# Altium PCB Project.PcbDoc (part 2 of 5)
Units mm, origin at the board's own origin, x right, y up, seen from the top; angles counter-clockwise.
Board outline 95 x 65 mm, 6 copper layers (Top Layer, L2 - GND, L3 - PWR, L4 - Sig, L5 - GND, Bottom Layer), stack 1.538 mm thick; 346 components, 317 nets, 1244 pads, 645 vias.
Unrouted connection lines stored in the file: 109.
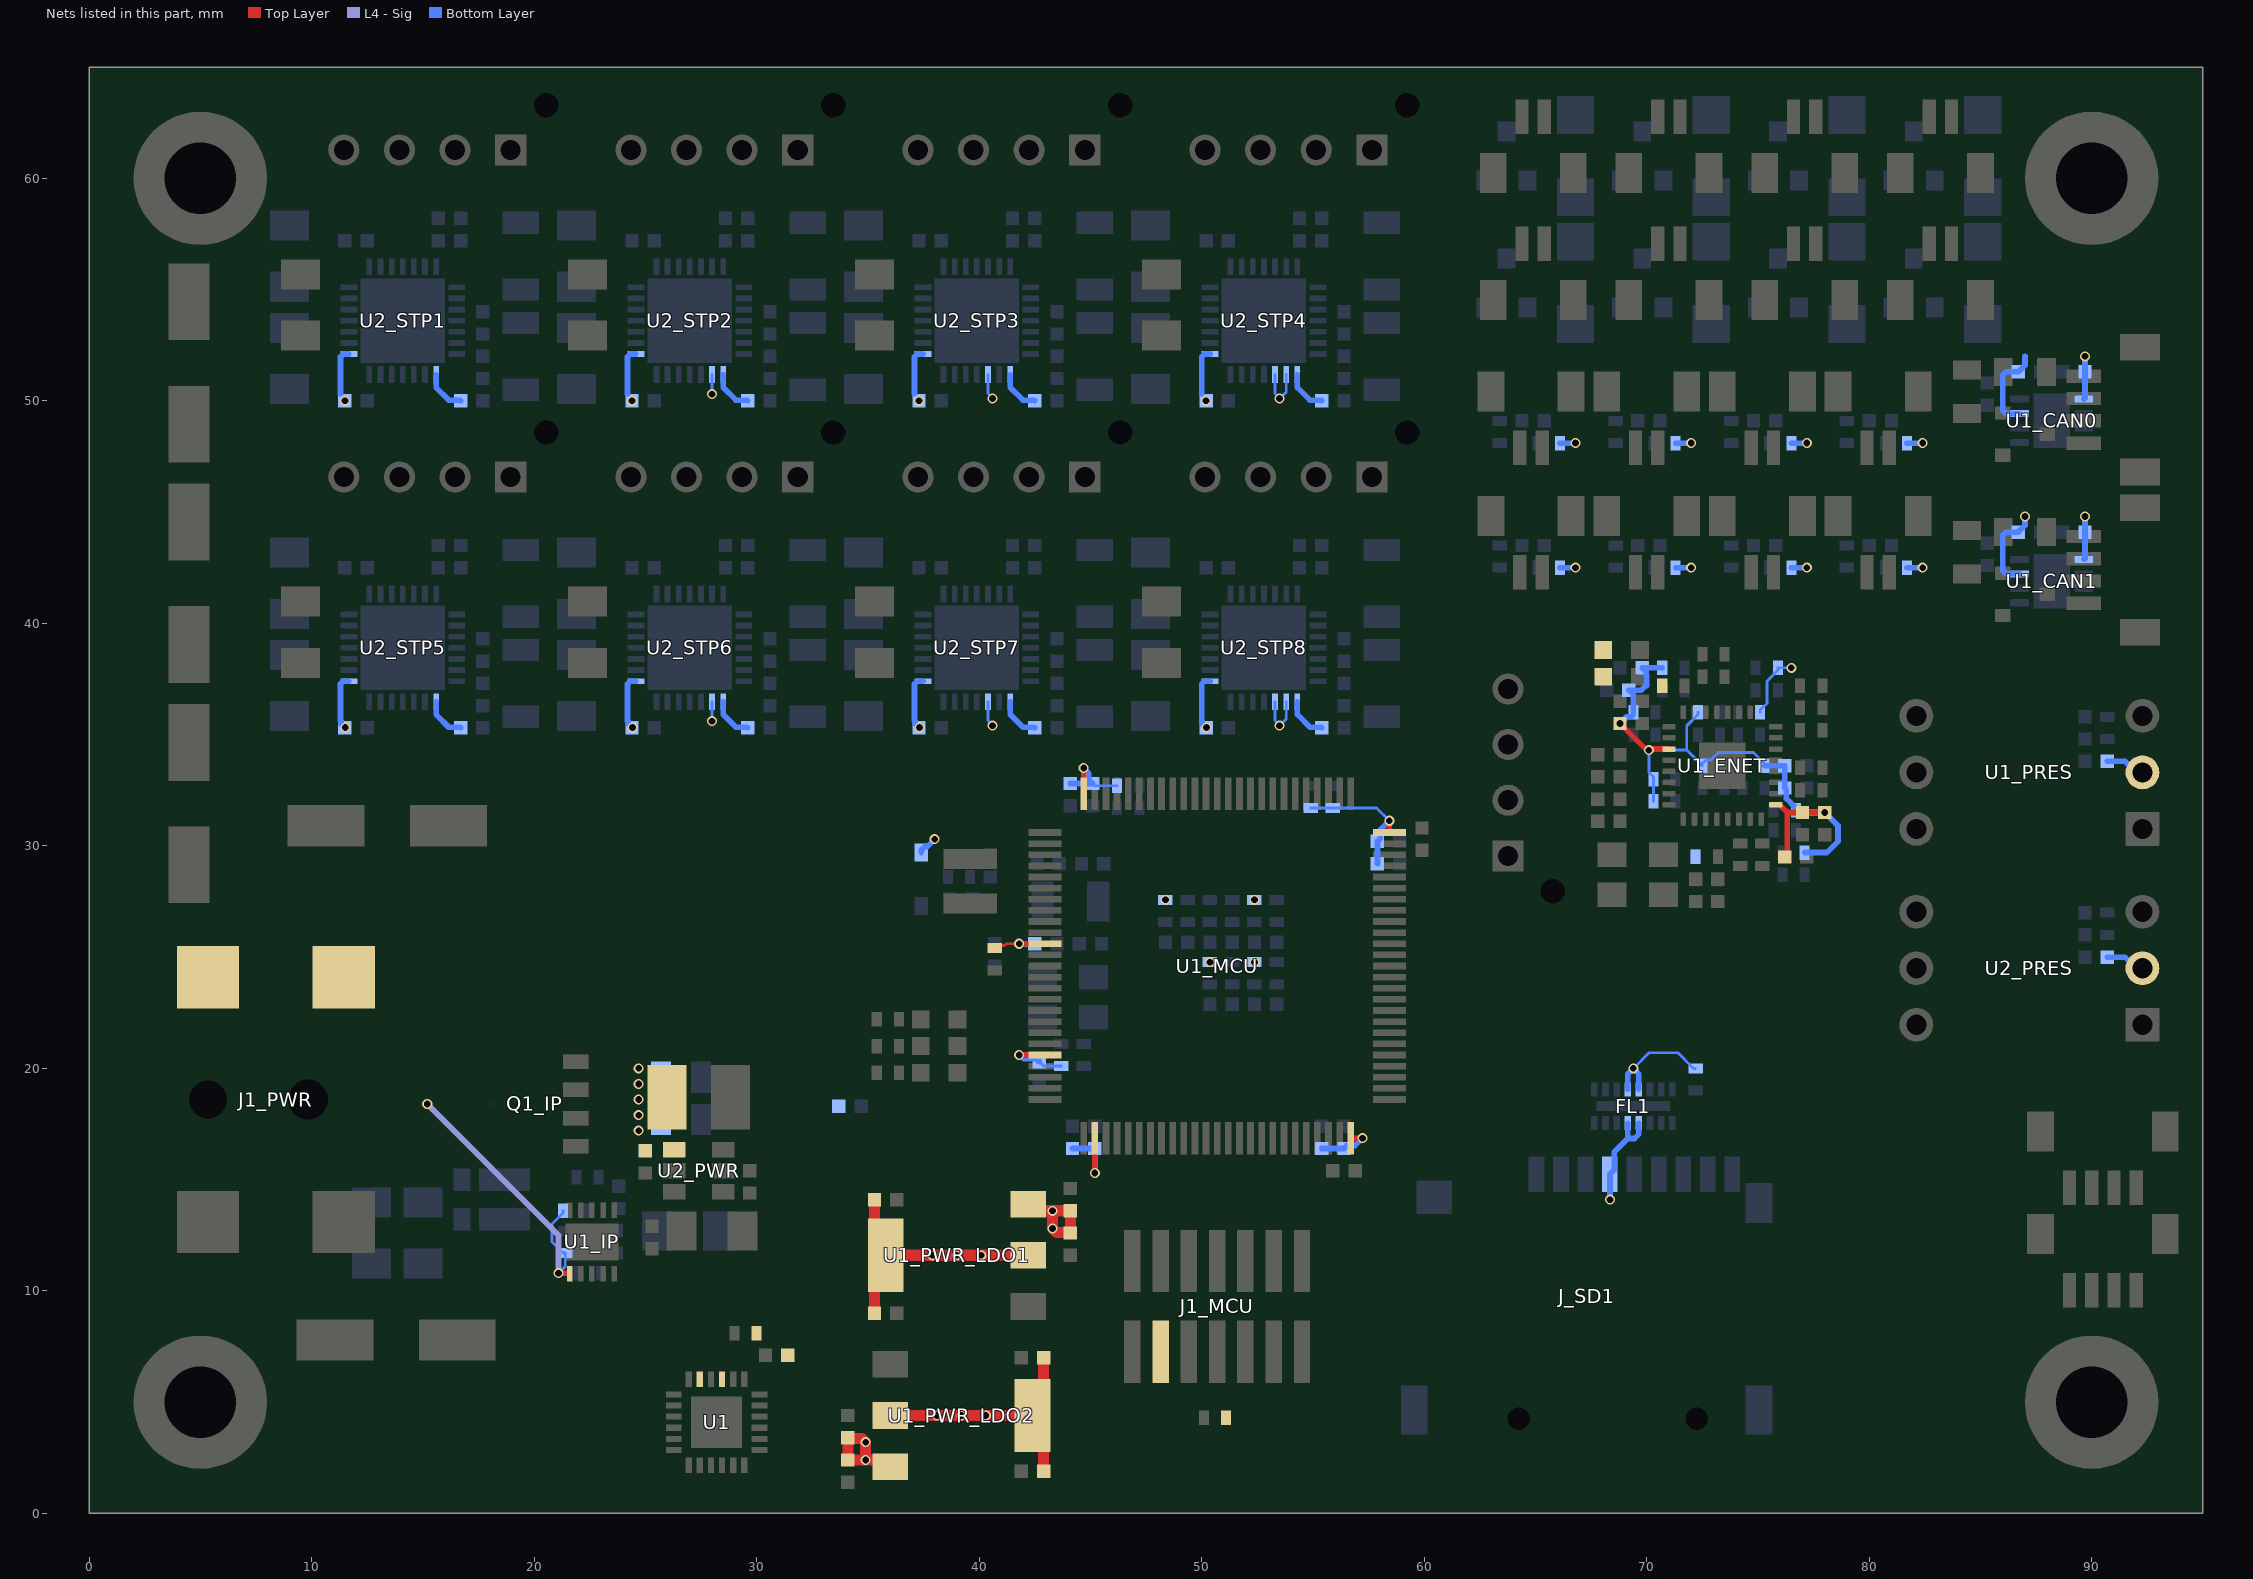
[diagram p5: the nets of this part, all layers, seen from the top]

## Components (designator, comment, footprint, x,y, rotation, side; value= is the part's Value field where it differs from the comment) (continued)
R26_ENET "CR0402-JW-222GLF" "Generic 0402 Resistor" 69.9,36 r180 bottom value=2.2k
R27_ENET "CR0402-JW-222GLF" "Generic 0402 Resistor" 73,32.6 r0 bottom value=2.2k
R28_ENET "CR0402-JW-222GLF" "Generic 0402 Resistor" 74.8,32.6 r180 bottom value=2.2k
R29_ENET "CR0402-JW-222GLF" "Generic 0402 Resistor" 72.7,28.5 r0 bottom value=2.2k
R30_ENET "CR0402-JW-222GLF" "Generic 0402 Resistor" 72.8,35 r0 bottom value=2.2k
R31_ENET "CR0402-JW-222GLF" "Generic 0402 Resistor" 76.2,30.7 r180 bottom value=2.2k
R32_ENET "CR0402-JW-222GLF" "Generic 0402 Resistor" 74.6,35 r180 bottom value=2.2k
R33_ENET "CR0402-JW-222GLF" "Generic 0402 Resistor" 75.4,37 r180 bottom value=2.2k
R34_ENET "CR0402-JW-222GLF" "Generic 0402 Resistor" 71.2,37 r0 bottom value=2.2k
R35_ENET "CR0402-JW-222GLF" "Generic 0402 Resistor" 76.6,28.7 r180 bottom value=2.2k
R36_ENET "CR0402-JW-222GLF" "Generic 0402 Resistor" 69.9,35 r0 bottom value=2.2k
R51 "ERJ-2GEJ103X" "Generic 0402 Resistor" 72.2,19.5 r90 bottom value=10k
TVS1_CAN0 "PESD2CANFD54VT-QR" PESD2CANFD54VT-QR 87,48.5 r270 top (schematic designator TVS1)
TVS1_CAN1 "PESD2CANFD54VT-QR" PESD2CANFD54VT-QR 87,41.3 r270 top (schematic designator TVS1)
U1 "PI4IOE5V6416ZDEX" PI4IOE5V6416ZDEX 28.2,4.1 r0 top
U1_CAN0 "TJA1051TK/3/1J" TJA1044xxK 88.2,49.1 r0 bottom (schematic designator U1)
U1_CAN1 "TJA1051TK/3/1J" TJA1044xxK 88.2,41.9 r0 bottom (schematic designator U1)
U1_ENET "DP83826ERHBR" DP83826ERHBR 73.4,33.6 r0 top
U1_IP "LTC4368CDD-2#PBF" DFN-10_3x3x0.8mm_P0.5mm 22.6,12.2 r90 top
U1_MCU "STM32H723VET6" STM32H723VxT 50.7,24.6 r0 top
U1_PRES "XGZP6857A100KPGPN33" 6-DIP_XGZP6857 87.2,33.3 r180 top
U1_PWR_LDO1 "AZ1117IH-3.3TRG1" ZLDO1117QG33TA 39,11.6 r90 top (schematic designator U1_PWR)
U1_PWR_LDO2 "AZ1117IH-3.3TRG1" ZLDO1117QG33TA 39.2,4.4 r270 top (schematic designator U1_PWR)
U2_PRES "XGZP6857A100KPGPN33" 6-DIP_XGZP6857 87.2,24.5 r180 top
U2_PWR "AP63205WU-7" "TSOT-26-6 - 3.2mm" 27.4,15.4 r90 top
U2_STP1 "TMC2209-LA" QFN-28_5x5x0.9mm_P0.5mm 14.1,53.6 r180 bottom (schematic designator U2)
U2_STP2 "TMC2209-LA" QFN-28_5x5x0.9mm_P0.5mm 27,53.6 r180 bottom (schematic designator U2)
U2_STP3 "TMC2209-LA" QFN-28_5x5x0.9mm_P0.5mm 39.9,53.6 r180 bottom (schematic designator U2)
U2_STP4 "TMC2209-LA" QFN-28_5x5x0.9mm_P0.5mm 52.8,53.6 r180 bottom (schematic designator U2)
U2_STP5 "TMC2209-LA" QFN-28_5x5x0.9mm_P0.5mm 14.1,38.9 r180 bottom (schematic designator U2)
U2_STP6 "TMC2209-LA" QFN-28_5x5x0.9mm_P0.5mm 27,38.9 r180 bottom (schematic designator U2)
U2_STP7 "TMC2209-LA" QFN-28_5x5x0.9mm_P0.5mm 39.9,38.9 r180 bottom (schematic designator U2)
U2_STP8 "TMC2209-LA" QFN-28_5x5x0.9mm_P0.5mm 52.8,38.9 r180 bottom (schematic designator U2)
Y1_ENET "ECS-250-12-33B2Q-JES-TR3" ECS-250-12-33B2Q-JES-TR3 69.6,28.7 r0 top
Y1_MCU "Q0.032768-JTX310-7-10-T3-HMR-LF" JTX310 44.1,27.5 r0 bottom
Y2_MCU "ECS-250-12-33B2Q-JES-TR3" ECS-250-12-33B2Q-JES-TR3 44,23.2 r180 bottom

## Footprints (in the part's own frame and the unit in brackets; to place one, negate y for a bottom-side part, rotate by r counter-clockwise, add the part's x,y. Pads: shape width x height; smd on the part's side, far side on the other; paste and mask are expansions set on the pad)
6-DIP_XGZP6857 [mm] "CF Sensor XGZP6857 6-DIP"
  rrect6% 1.52x1.52 hole 0.91: 1(-5.08,2.54)
  round 1.52 hole 0.91: 2(-5.08,0) 3(-5.08,-2.54) 4(5.08,-2.54) 5(5.08,0) 6(5.08,2.54)
  silkscreen extent -5.27,-4.3 4.3,4.3, body extent -5.21,-4.25 5.21,4.25, height 9.6
"0805 Resistor" [mm] "Chip Resistor, 2-Leads, Body 2.00x1.20mm, IPC Medium Density"
  rect 0.85x1.25 smd: 1(-0.975,0) 2(0.975,0)
  silkscreen extent -0.15,-0.53 0.15,0.53, body extent -1,-0.63 1,0.63, height 0.5
"CUI PJ-002AH-SMT-TR" [mm]
  rect 2.8x2.8 smd: 1(-2.25,5.5) 1(3.85,5.5) 2(-2.25,-5.5) 3(3.85,-5.5)
  round 0 hole 1.7 unplated: M(-2.25,0)
  round 0 hole 1.8 unplated: M(2.25,0)
  silkscreen extent -7.25,-4.5 7.55,4.5, body extent -7.25,-6.3 7.55,6.3, height 11.4
DFN-10_3x3x0.8mm_P0.5mm [mm] "LTC4368CDD-2#PBF"
  rect 0.7x0.25 smd: 1(-1.425,1) 2(-1.425,0.5) 3(-1.425,0) 4(-1.425,-0.5) 5(-1.425,-1) 6(1.425,-1) 7(1.425,-0.5) 8(1.425,0) 9(1.425,0.5) 10(1.425,1)
  rect 1.65x2.38 smd: 11(0,0)
  silkscreen extent -2.06,-1.55 1.55,1.56, body extent -1.88,-1.65 1.88,1.65, height 0.25
DP83826ERHBR [mm] "32-VQFN (5x5)"
  rrect40% 0.6x0.25 smd: 1(-2.4,1.75) 2(-2.4,1.25) 3(-2.4,0.75) 4(-2.4,0.25) 5(-2.4,-0.25) 6(-2.4,-0.75) 7(-2.4,-1.25) 8(-2.4,-1.75) 17(2.4,-1.75) 18(2.4,-1.25) 19(2.4,-0.75) 20(2.4,-0.25) 21(2.4,0.25) 22(2.4,0.75) 23(2.4,1.25) 24(2.4,1.75)
  rrect40% 0.25x0.6 smd: 9(-1.75,-2.4) 10(-1.25,-2.4) 11(-0.75,-2.4) 12(-0.25,-2.4) 13(0.25,-2.4) 14(0.75,-2.4) 15(1.25,-2.4) 16(1.75,-2.4) 25(1.75,2.4) 26(1.25,2.4) 27(0.75,2.4) 28(0.25,2.4) 29(-0.25,2.4) 30(-0.75,2.4) 31(-1.25,2.4) 32(-1.75,2.4)
  rrect4% 2.1x2.1 smd: 33(0,0)
  silkscreen extent -2.95,-2.5 2.5,2.5, body extent -2.5,-2.5 2.5,2.5, height 1
ECLAMP2410PQTCT [mm]
  rect 0.63x0.3 smd: 1(-0.76,1.75) 2(-0.76,1.25) 3(-0.76,0.75) 4(-0.76,0.25) 5(-0.76,-0.25) 6(-0.76,-0.75) 7(-0.76,-1.25) 8(-0.76,-1.75) 9(0.76,-1.75) 10(0.76,-1.25) 11(0.76,-0.75) 12(0.76,-0.25) 13(0.76,0.25) 14(0.76,0.75) 15(0.76,1.25) 16(0.76,1.75)
  rect 0.45x3.3 smd paste-3: 17(0,0)
  silkscreen extent -1.55,-2.22 0.8,2.22, body extent -0.85,-2.05 0.85,2.05, height 0.7
ECS-250-12-33B2Q-JES-TR3 [mm] "3.2x2.5"
  rect 1.3x1.1 smd: 1(-1.15,-0.9) 2(1.15,-0.9) 3(1.15,0.9) 4(-1.15,0.9)
  silkscreen extent -2.37,-1.25 0.27,1.25, body extent -1.6,-1.25 1.6,1.25, height 0.8
FP-95400-MFG [mm]
  rect 1.7x1.68 smd paste+0 mask+0: 1(-1.85,0) 2(1.85,0)
  silkscreen extent -2.25,-1.4 2.25,1.4, body extent -2.55,-1.34 2.55,1.33, height 2.29
FP-B4B-XH-AM_LF_SN-MFG [mm]
  rect 1.4x1.4 hole 0.9: 1(3.75,-0.525)
  round 1.4 hole 0.9: 2(1.25,-0.525) 3(-1.25,-0.525) 4(-3.75,-0.525)
  rect 0x0 hole 1.1 unplated: H1(5.35,1.475)
  silkscreen extent -6.2,-2.88 6.77,2.88, body extent -6.3,-2.98 6.3,2.98, height 0.25
FP-DFE322520F_D-IPC_A [mm]
  rect 1.753x2.904 smd paste+0 mask+0: 1(-1.425,0) 2(1.425,0)
  silkscreen extent -0.25,-1.45 0.25,1.45, body extent -2.8,-1.95 2.8,1.95, height 0.25
FP-SML-D12-MFG [mm]
  rect 0.8x0.8 smd paste+0 mask+0: 1(-0.825,0) 2(0.825,0)
  silkscreen extent -0.2,-0.3 0.2,0.3, body extent -0.8,-0.4 0.8,0.4, height 0.56
FP-WSKW0612-MFG [mm]
  rect 1.01x2.287 smd: 1(-0.885,-0.571) 2(0.885,-0.572)
  rect 1.01x0.762 smd: S1(-0.885,1.334) S2(0.885,1.334)
  silkscreen extent -1.83,-1.65 0,1.65, body extent -0.75,-1.53 0.75,1.53, height 0.71
FTSH-107-01-L-DV-K-TR [mm]
  rect 0.74x2.79 smd: 1(-3.81,-2.035) 2(-3.81,2.035) 3(-2.54,-2.035) 4(-2.54,2.035) 5(-1.27,-2.035) 6(-1.27,2.035) 7(0,-2.035) 8(0,2.035) 9(1.27,-2.035) 10(1.27,2.035) 11(2.54,-2.035) 12(2.54,2.035) 13(3.81,-2.035) 14(3.81,2.035)
  silkscreen extent -4.51,-4.09 4.51,0.27, body extent -4.61,-3.53 4.61,3.53, height 0.25
"Generic 0402 capacitor" [mm] "Generic 0402 capacitor"
  rect 0.6x0.6 smd: 1(-0.5,0) 2(0.5,0)
  body extent -0.5,-0.25 0.5,0.25, height 0.5
"Generic 0402 Resistor" [mm]
  rect 0.45x0.65 smd: 1(-0.5,0) 2(0.5,0)
  silkscreen extent -0.1,-0.25 0.1,0.25, body extent -0.5,-0.25 0.5,0.25, height 0.35
"Generic 0805 Cap" [mm] "Chip Capacitor, 2-Leads, Body 2.00x1.25mm, IPC Medium Density"
  rect 0.9x1.4 smd: 1(-0.9,0) 2(0.9,0)
  silkscreen extent -0.05,-0.6 0.05,0.6, body extent -1,-0.63 1,0.63, height 0.9
"Generic 1206 Capacitor" [mm] "Chip Capacitor, 2-Leads, Body 3.20x1.60mm, IPC Medium Density"
  rect 1.35x1.75 smd: 1(-1.375,0) 2(1.375,0)
  silkscreen extent -0.3,-0.77 0.3,0.77, body extent -1.6,-0.8 1.6,0.8, height 1.6
"Generic 1206 resistor" [mm] "Chip Resistor, 2-Leads, Body 3.20x1.60mm, IPC Medium Density"
  rect 1x1.65 smd: 1(-1.5,0) 2(1.5,0)
  silkscreen extent -0.6,-0.72 0.6,0.72, body extent -1.6,-0.8 1.6,0.8, height 0.6
"JST BM02B-SRSS-TB" [mm] "1.0mm pitch/Disconnectable Crimp style connector"
  rect 0.6x1.55 smd: 1(-0.5,-1.262) 2(0.5,-1.262)
  rect 1.2x1.8 smd: M(-1.8,1.262) M(1.8,1.262)
  silkscreen extent -2.03,-1.68 2.03,1.91, body extent -2,-1.69 2,1.91, height 4.32
"JST BM04B-SRSS-TB" [mm] "1.0mm pitch/Disconnectable Crimp style connector"
  rect 0.6x1.55 smd: 1(-1.5,-1.262) 2(-0.5,-1.262) 3(0.5,-1.262) 4(1.5,-1.262)
  rect 1.2x1.8 smd: M(-2.8,1.262) M(2.8,1.262)
  silkscreen extent -3.03,-1.68 3.03,1.91, body extent -3,-1.69 3,1.91, height 4.32
JTX310 [mm]
  rect 1x1.8 smd: 1(-1.25,0) 2(1.25,0)
  silkscreen extent -0.5,-0.85 0.5,0.85, body extent -1.6,-0.75 1.6,0.75, height 0.9
MS920SE-FL27E [mm]
  rect 0.9x2.4 smd: 1(-1,6.85) 2(1,6.85)
  silkscreen extent -4.75,-4.75 4.75,9.1, body extent -4.75,-4.75 4.75,8.05, height 2.85
MSD-4-A [mm] "micro sd"
  rect 0.7x1.6 smd: 1(2.25,7.75) 2(1.15,7.75) 3(0.05,7.75) 4(-1.05,7.75) 5(-2.15,7.75) 6(-3.25,7.75) 7(-4.35,7.75) 8(-5.45,7.75) 9(-6.55,7.75)
  round 0 hole 1 unplated: M1(-4.95,-3.25) M2(3.05,-3.25)
  rect 1.2x1.8 smd: S1(-7.75,6.45)
  rect 1.6x1.5 smd: S2(6.85,6.7)
  rect 1.2x2.2 smd: S3(-7.75,-2.85) S4(7.75,-2.85)
  silkscreen extent -7.37,-7.25 7.37,9.2, body extent -8.08,-7.25 8.07,7.8, height 1.8
PESD2CANFD54VT-QR [mm] "TO-236AB"
  rect 0.6x0.7 smd paste-0.05: 1(-0.95,-1) 2(0.95,-1) 3(0,1)
  silkscreen extent -1.88,-1.08 1.45,0.65, body extent -1.45,-1.15 1.45,1.15, height 1.1
PI4IOE5V6416ZDEX [mm]
  rect 0.7x0.28 smd: 1(-1.93,1.25) 2(-1.93,0.75) 3(-1.93,0.25) 4(-1.93,-0.25) 5(-1.93,-0.75) 6(-1.93,-1.25) 13(1.93,-1.25) 14(1.93,-0.75) 15(1.93,-0.25) 16(1.93,0.25) 17(1.93,0.75) 18(1.93,1.25)
  rect 0.28x0.7 smd: 7(-1.25,-1.93) 8(-0.75,-1.93) 9(-0.25,-1.93) 10(0.25,-1.93) 11(0.75,-1.93) 12(1.25,-1.93) 19(1.25,1.93) 20(0.75,1.93) 21(0.25,1.93) 22(-0.25,1.93) 23(-0.75,1.93) 24(-1.25,1.93)
  rect 2.3x2.3 smd: 25(0,0)
  silkscreen extent -2.35,-2 2,2, body extent -2,-2 2,2, height 0.9
QFN-28_5x5x0.9mm_P0.5mm [mm] "ADI TQFN-28"
  rect 0.757x0.255 smd: 1(-2.423,1.5) 2(-2.423,1) 3(-2.423,0.5) 4(-2.423,0) 5(-2.423,-0.5) 6(-2.423,-1) 7(-2.423,-1.5) 15(2.423,-1.5) 16(2.423,-1) 17(2.423,-0.5) 18(2.423,0) 19(2.423,0.5) 20(2.423,1) 21(2.423,1.5)
  rect 0.255x0.757 smd: 8(-1.5,-2.423) 9(-1,-2.423) 10(-0.5,-2.423) 11(0,-2.423) 12(0.5,-2.423) 13(1,-2.423) 14(1.5,-2.423) 22(1.5,2.423) 23(1,2.423) 24(0.5,2.423) 25(0,2.423) 26(-0.5,2.423) 27(-1,2.423) 28(-1.5,2.423)
  rect 3.8x3.8 smd: 29(0,0)
  silkscreen extent -3.07,-2.63 2.63,2.63, body extent -2.5,-2.5 2.5,2.5, height 0.89
SML-D12P8WT86C [mm]
  rect 0.8x0.8 smd paste+0 mask+0: 1(-0.825,0) 2(0.825,0)
  silkscreen extent -0.2,-0.3 0.2,0.3, body extent -0.8,-0.4 0.8,0.4, height 0.56
SOD-323 [mm]
  rect 0.8x0.6 smd paste+0 mask+0: 1(-1.2,0) 2(1.2,0)
  silkscreen extent -1.45,-0.7 1,0.7, body extent -1.34,-0.65 1.34,0.65, height 1.15
SSM3K376R,LF [mm] "SOT23F"
  rect 0.9x0.8 smd: 1(-1.1,0.95) 2(-1.1,-0.95) 3(1.1,0)
  silkscreen extent -1.98,-1.4 0.9,1.4, body extent -1.2,-1.45 1.2,1.45, height 0.88
STL220N6F7 [mm] "8-PowerVDFN"
  rect 0.65x1.15 smd: 1(-1.905,-3.48) 2(-0.635,-3.48) 3(0.635,-3.48) 4(1.905,-3.48)
  round 0.025 smd: 5(0,0.232)
  silkscreen extent -2.8,-2.87 2.72,1.97, body extent -2.6,-3.78 2.6,2.37, height 1
STM32H723VxT [mm]
  rect 1.475x0.3 smd: 1(-7.738,6) 2(-7.738,5.5) 3(-7.738,5) 4(-7.738,4.5) 5(-7.738,4) 6(-7.738,3.5) 7(-7.738,3) 8(-7.738,2.5) 9(-7.738,2) 10(-7.738,1.5) 11(-7.738,1) 12(-7.738,0.5) 13(-7.738,0) 14(-7.738,-0.5) 15(-7.738,-1) 16(-7.738,-1.5) 17(-7.738,-2) 18(-7.738,-2.5) 19(-7.738,-3) 20(-7.738,-3.5) 21(-7.738,-4) 22(-7.738,-4.5) 23(-7.738,-5) 24(-7.738,-5.5) 25(-7.738,-6) 51(7.738,-6) 52(7.738,-5.5) 53(7.738,-5) 54(7.738,-4.5) 55(7.738,-4) 56(7.738,-3.5) 57(7.738,-3) 58(7.738,-2.5) 59(7.738,-2) 60(7.738,-1.5) 61(7.738,-1) 62(7.738,-0.5) 63(7.738,0) 64(7.738,0.5) 65(7.738,1) 66(7.738,1.5) 67(7.738,2) 68(7.738,2.5) 69(7.738,3) 70(7.738,3.5) 71(7.738,4) 72(7.738,4.5) 73(7.738,5) 74(7.738,5.5) 75(7.738,6)
  rect 0.3x1.475 smd: 26(-6,-7.738) 27(-5.5,-7.738) 28(-5,-7.738) 29(-4.5,-7.738) 30(-4,-7.738) 31(-3.5,-7.738) 32(-3,-7.738) 33(-2.5,-7.738) 34(-2,-7.738) 35(-1.5,-7.738) 36(-1,-7.738) 37(-0.5,-7.738) 38(0,-7.738) 39(0.5,-7.738) 40(1,-7.738) 41(1.5,-7.738) 42(2,-7.738) 43(2.5,-7.738) 44(3,-7.738) 45(3.5,-7.738) 46(4,-7.738) 47(4.5,-7.738) 48(5,-7.738) 49(5.5,-7.738) 50(6,-7.738) 76(6,7.738) 77(5.5,7.738) 78(5,7.738) 79(4.5,7.738) 80(4,7.738) 81(3.5,7.738) 82(3,7.738) 83(2.5,7.738) 84(2,7.738) 85(1.5,7.738) 86(1,7.738) 87(0.5,7.738) 88(0,7.738) 89(-0.5,7.738) 90(-1,7.738) 91(-1.5,7.738) 92(-2,7.738) 93(-2.5,7.738) 94(-3,7.738) 95(-3.5,7.738) 96(-4,7.738) 97(-4.5,7.738) 98(-5,7.738) 99(-5.5,7.738) 100(-6,7.738)
  silkscreen extent -7.97,-6.65 6.65,6.83, body extent -8,-8 8,8, height 1.6
TJA1044xxK [mm] "8-HVSON (3x3)"
  rrect25% 0.84x0.32 smd: 1(-1.445,0.975) 2(-1.445,0.325) 3(-1.445,-0.325) 4(-1.445,-0.975) 5(1.445,-0.975) 6(1.445,-0.325) 7(1.445,0.325) 8(1.445,0.975)
  rect 1.65x2.45 smd paste-2: 9(0,0)
  silkscreen extent -2.25,-1.5 1.5,1.5, body extent -1.5,-1.5 1.52,1.5, height 1
"TSOT-26-6 - 3.2mm" [mm]
  rect 0.7x1 smd: 1(0.95,1.1) 2(0,1.1) 3(-0.95,1.1) 4(-0.95,-1.1) 5(0,-1.1) 6(0.95,-1.1)
  silkscreen extent 1.55,1.24 1.65,1.35, body extent -1.45,-1.2 1.45,1.2, height 1
UWZ1V101MCL1GS [mm]
  rect 3.45x1.85 smd: 1(-2.75,0) 2(2.75,0)
  silkscreen extent -3.4,-3.5 3.55,3.5, body extent -3.75,-3.4 3.75,3.4, height 8
ZLDO1117QG33TA [mm] "SOT-223-3"
  rect 1.2x1.6 smd: 1(-2.3,-3.2) 2(0,-3.2) 3(2.3,-3.2)
  rect 3.3x1.6 smd: 4(0,3.2)
  silkscreen extent -3.4,-4.68 3.4,1.9, body extent -3.25,-3.5 3.25,3.5, height 1.65

## Part data
B1_MCU: library part CMP-00029-00001-1, "Secondary Battery, Manganese Silicon Lithium, 3V, 0.011Ah", Voltage Rating=3V, Pins=2, RoHS Compliant=Yes
C1 C1_BTN1 C1_BTN2 C1_BTN3 C1_BTN4 C1_BTN5 C1_BTN6 C1_BTN7 C1_BTN8 C1_CAN0 C1_CAN1 C1_ENET C1_MCU C1_PRES C1_STP1 C1_STP2 C1_STP3 C1_STP4 C1_STP5 C1_STP6 C1_STP7 C1_STP8 C2_CAN0 C2_CAN1 C2_ENET C2_PRES C2_STP1 C2_STP2 C2_STP3 C2_STP4 C2_STP5 C2_STP6 C2_STP7 C2_STP8 C3_PRES C3_STP1 C3_STP2 C3_STP3 C3_STP4 C3_STP5 C3_STP6 C3_STP7 C3_STP8 C4_PRES C4_STP1 C4_STP2 C4_STP3 C4_STP4 C4_STP5 C4_STP6 C4_STP7 C4_STP8 C5_ENET C5_STP1 C5_STP2 C5_STP3 C5_STP4 C5_STP5 C5_STP6 C5_STP7 C5_STP8 C7_ENET C8_ENET C9_PWR C11_ENET C12_PWR C13_MCU C13_PWR C14_MCU C14_PWR C15_MCU C15_PWR C16_MCU C16_PWR C17_MCU C18_MCU C19_MCU C32: library part CMP-001-00084-12, "Ceramic Capacitor, Multilayer, Ceramic, 50V, 10% +Tol, 10% -Tol, X7R, 15% TC, 0.1uF, Surface Mount, 0402", Capacitor Type=Ceramic, Case/Package=0402, Max Operating Temperature=125°C, Min Operating Temperature=-55°C, Package Shape=Rectangular, Temperature Coefficient=X7R, Tolerance=10%, Voltage Rating=50V, AECQ=Yes, Dielectric Material=Ceramic, Mounting Technology="Surface Mount", Multilayer=Yes, Packaging="Tape and Reel", Pins=2, Reach SVHC Compliant=Yes, RoHS Compliant=Yes, Terminal Finish=Nickel, Termination=Wraparound
  C13_MCU: PlaceNear=C13_MCU.2:U1_MCU.100:5mm
  C14_MCU: PlaceNear=C14_MCU.2:U1_MCU.11:5mm
  C15_MCU: PlaceNear=C15_MCU.2:U1_MCU.27:5mm
  C16_MCU: PlaceNear=C16_MCU.2:U1_MCU.50:5mm
  C17_MCU: PlaceNear=C17_MCU.2:U1_MCU.75:5mm
  C18_MCU: PlaceNear=C18_MCU.2:U1_MCU.21:5mm
C1_IP C17_PWR C18_PWR C19_PWR C20_PWR: library part CMP-001-00099-2, "Aluminum Electrolytic Capacitor, Polarized, Aluminum (wet), 35V, 20% +Tol, 20% -Tol, 100uF, Surface Mount, 2626", Capacitor Type=Aluminium, Case/Package="6.60mm x 6.60mm", Max Operating Temperature=105°C, Min Operating Temperature=-55°C, Ripple Current=84mA, Voltage Rating=35V, AECQ=Yes, Mounting Technology="Surface Mount", Pins=2, RoHS Compliant=Yes
C1_PWR_LDO1 C1_PWR_LDO2 C4_PWR_LDO1 C4_PWR_LDO2 C6_STP1 C6_STP2 C6_STP3 C6_STP4 C6_STP5 C6_STP6 C6_STP7 C6_STP8: library part CMP-001-00085-5, "Ceramic Capacitor, Multilayer, Ceramic, 10V, 20% +Tol, 20% -Tol, X5R, 15% TC, 4.7uF, Surface Mount, 0402", Capacitor Type=Ceramic, Case/Package=0402, Max Operating Temperature=85°C, Min Operating Temperature=-55°C, Package Shape=Rectangular, Rated DC Voltage (URdc)=10V, Temperature Coefficient=X5R, Tolerance=0%, Tolerance  (fill in as +-)=20%, AECQ=Yes, Dielectric Material=Ceramic, Mounting Technology="Surface Mount", Multilayer=Yes, Packaging="Tape and Reel", Pins=2, Reach SVHC Compliant=Yes, RoHS Compliant=Yes, Termination=Wraparound, Tolerance (fill in as +-)=20%, Voltage Rating=10V
C2_IP C3_IP C10_PWR C11_PWR: library part CMP-001-00086-3, "Ceramic Capacitor, Multilayer, Ceramic, 100V, 10% +Tol, 10% -Tol, X7R, 15% TC, 2.2uF, Surface Mount, 1206", Capacitor Type=Ceramic, Case/Package=1206, Max Operating Temperature=-55°C, Min Operating Temperature=125°C, Temperature Coefficient=X7R, Tolerance=10%, Voltage Rating=100V, AECQ=Yes, Mounting Technology=SMD, Pins=2, RoHS Compliant=Yes
C2_MCU C3_MCU: library part CMP-001-00111-2, "Ceramic Capacitor, Multilayer, Ceramic, 50V, 3.57% +Tol, 3.57% -Tol, C0G, 30ppm/Cel TC, 0.000007uF, Surface Mount, 0402", Capacitor Type=Ceramic, Case/Package=0402, Max Operating Temperature=125°C, Min Operating Temperature=-55°C, Temperature Coefficient=C0G, Tolerance=3.5%, Voltage Rating=50V, AECQ=Yes, Mounting Technology="Surface Mount", Pins=2, RoHS Compliant=Yes
C2_PWR_LDO1 C2_PWR_LDO2 C3_PWR_LDO1 C3_PWR_LDO2 C4_IP: library part CMP-001-00103-2, "Ceramic Capacitor, Multilayer, Ceramic, 16V, 20% +Tol, 20% -Tol, X7R, 15% TC, 0.22uF, Surface Mount, 0402", Capacitor Type=Ceramic, Case/Package=0402, Max Operating Temperature=125°C, Min Operating Temperature=-55°C, Temperature Coefficient=X7R, Tolerance=20%, Voltage Rating=16V, AECQ=Yes, Mounting Technology=SMD, Pins=2
C3_CAN0 C3_CAN1: library part CMP-001-00110-2, "Ceramic Capacitor, Multilayer, Ceramic, 100V, 10% +Tol, 10% -Tol, X7R, 15% TC, 0.0047uF, Surface Mount, 0402", Capacitor Type=Ceramic, Case/Package=0402, Max Operating Temperature=125°C, Min Operating Temperature=-55°C, Temperature Coefficient=X7R, Tolerance=10%, Voltage Rating=100V, AECQ=Yes, Mounting Technology=SMD, Pins=2, RoHS Compliant=Yes
C3_ENET C9_ENET C9_MCU: library part CMP-001-00108-2, "Multilayer Ceramic Capacitors MLCC - SMD/SMT 0402 10uF 6.3VDC 20% X6S AEC-Q200", Capacitor Type=Ceramic, Case/Package=0402, Max Operating Temperature=105°C, Min Operating Temperature=-55°C, Temperature Coefficient=X6S, Tolerance=20%, Voltage Rating=6.3V, AECQ=Yes, Mounting Technology="Surface Mount", Pins=2, RoHS Compliant=Yes
C4_ENET C5_PWR C6_PWR C10_ENET: library part CMP-001-00104-2, "Cap Cer 1UF 20V X7T 0402", Capacitor Type=Ceramic, Case/Package=0402, Max Operating Temperature=125°C, Min Operating Temperature=-55°C, Temperature Coefficient=X7R, Tolerance=20%, Voltage Rating=10V, AECQ=Yes, Mounting Technology="Surface Mount", Pins=2, RoHS Compliant=Yes
C4_MCU C5_MCU C13_ENET C14_ENET: library part CMP-001-00109-2, "Ceramic Capacitor, Multilayer, Ceramic, 25V, 5% +Tol, 5% -Tol, C0G, 30ppm/Cel TC, 0.000012uF, Surface Mount, 0402", Capacitor Type=Ceramic, Case/Package=0402, Max Operating Temperature=125°C, Min Operating Temperature=-55°C, Temperature Coefficient=C0G, Tolerance=5%, Voltage Rating=25V, AECQ=Yes, Mounting Technology="Surface Mount", Pins=2, RoHS Compliant=Yes
C5_IP: library part CMP-001-00102-3, "Ceramic Capacitor, Multilayer, Ceramic, 100V, 10% +Tol, 10% -Tol, X7R, 15% TC, 0.0015uF, Surface Mount, 0402", Capacitor Type=Ceramic, Case/Package=0402, Max Operating Temperature=125°C, Min Operating Temperature=-55°C, Temperature Coefficient=X7R, Tolerance=10%, Voltage Rating=100V, AECQ=Yes, Mounting Technology=SMD, Pins=2
C6_ENET C12_ENET: library part CMP-001-00101-2, "Ceramic Capacitor, Multilayer, Ceramic, 100V, 10% +Tol, 10% -Tol, X7R, 15% TC, 0.001uF, Surface Mount, 0402", Capacitor Type=Ceramic, Case/Package=0402, Max Operating Temperature=125°C, Min Operating Temperature=-55°C, Temperature Coefficient=X7R, Tolerance=10%, Voltage Rating=100V, AECQ=Yes, Mounting Technology=SMD, Pins=2
C7_MCU C8_MCU C10_MCU C11_MCU C12_MCU: library part CMP-001-00096-4, "Mlcc, 2.2 Uf, # 20 %, 0402, 6.3V, X7T, T&r Q200", Capacitor Type=Ceramic, Case/Package=0402, Max Operating Temperature=125°C, Min Operating Temperature=-55°C, Temperature Coefficient=X7T, Tolerance=20%, Voltage Rating=6.3V, AECQ=Yes, Mounting Technology=SMD, Pins=2
  C7_MCU: PlaceNear=C7_MCU.2:U1_MCU.73:5mm
  C8_MCU: PlaceNear=C8_MCU.2:U1_MCU.48:5mm
C7_PWR C8_PWR: library part CMP-001-00095-2, "22 µF ±20% 10V Ceramic Capacitor X7T 0805 (2012 Metric)", Capacitor Type=Ceramic, Case/Package=0805, Max Operating Temperature=125°C, Min Operating Temperature=-55°C, Temperature Coefficient=X7T, Tolerance=20%, Voltage Rating=10V, AECQ=Yes, Mounting Technology=SMD, Pins=2
C7_STP1 C7_STP2 C7_STP3 C7_STP4 C7_STP5 C7_STP6 C7_STP7 C7_STP8: library part CMP-001-00113-1, "50V 47nF X7R ±10% 0402 Multilayer Ceramic Capacitors MLCC - SMD/SMT ROHS", Capacitor Type=Ceramic, Case/Package=0402, Max Operating Temperature=125°C, Min Operating Temperature=-55°C, Tolerance=10%, Voltage Rating=50V, AECQ=No, Mounting Technology=SMD, Pins=2
C8_STP1 C8_STP2 C8_STP3 C8_STP4 C8_STP5 C8_STP6 C8_STP7 C8_STP8 C9_STP1 C9_STP2 C9_STP3 C9_STP4 C9_STP5 C9_STP6 C9_STP7 C9_STP8 C10_STP1 C10_STP2 C10_STP3 C10_STP4 C10_STP5 C10_STP6 C10_STP7 C10_STP8: library part CMP-001-00092-6, "Ceramic Capacitor, Multilayer, Ceramic, 50V, 20% +Tol, 20% -Tol, X5R, 15% TC, 10uF, Surface Mount, 1206", Capacitor Type=Ceramic, Case/Package=1206, Max Operating Temperature=85°C, Min Operating Temperature=-55°C, Package Shape=Rectangular, Temperature Characteristics Code=X5R, Tolerance=20%, Voltage Rating=50V, AECQ=No, Dielectric Material=Ceramic, JESD-609 Code=e3, Mounting Technology="Surface Mount", Multilayer=Yes, Packaging="Tape and Reel", Pins=2, Reach SVHC Compliant=Yes, RoHS Compliant=Yes, Temperature Coefficient=X5R, Terminal Finish=Nickel, Termination=Wraparound
C15_ENET: library part CMP-001-00093-4, "50V 2.2nF X7R 卤10% 0402 Multilayer Ceramic Capacitors MLCC - SMD/SMT ROHS", Capacitor Type=Ceramic, Case/Package=0402, Max Operating Temperature=150°C, Min Operating Temperature=-55°C, Package Shape=Rectangular, Temperature Coefficient=X7R, Tolerance=10%, Voltage Rating=50V, AECQ=Yes, Dielectric Material=Ceramic, Mounting Technology="Surface Mount", Multilayer=Yes, Packaging="Tape and Reel", Pins=2, Reach SVHC Compliant=Yes, RoHS Compliant=Yes
D1_ENET: library part CMP-007-00039-1, "Green 560nm LED Indication - Discrete 2.2V 0603 (1608 Metric)", Case/Package=0603, Colour=Green, Forward Voltage=2.2V, Pins=2
D1_MCU: library part CMP-004-00038-1, "Rectifier Diode, Schottky, 1 Phase, 1 Element, 0.35A, 30V V(RRM), Silicon", Case/Package=SOD-323, Forward Current=350mA, Forward Voltage=370mV, Max Operating Temperature=125°C, Min Breakdown Voltage=30V, Min Operating Temperature=-55°C, Max Output current=350mA, Pins=2, Reverse Recovery Time=10ns, RoHS Compliant=Yes
D2_ENET: library part CMP-007-00038-1, "Orange 605nm LED Indication - Discrete 2.2V 0603 (1608 Metric)", Case/Package=0603, Colour=Orange, Forward Voltage=2.2V, Pins=2
D2_MCU D3_MCU D4_MCU: library part CMP-007-00036-1, "Red 630nm LED Indication - Discrete 2.2V 0603 (1608 Metric)", Case/Package=0603, Colour=Red, Forward Voltage=2.2V, Pins=2
D_COIL1 D_COIL2 D_COIL3 D_COIL4 D_COIL5 D_COIL6 D_COIL7 D_COIL8: library part CMP-00005-4, "Rectifier Diode, Schottky, 1 Phase, 1 Element, 1.5A, 100V V(RRM), Silicon, DO-214AC", Case/Package=DO-214AC, Forward Current=1A, Forward Voltage=780mV, Max Operating Temperature=150°C, Min Operating Temperature=-55°C, Package Body Material=Plastic, Package Shape=Rectangular, Package Style="SMALL OUTLINEMeter", Peak Reflow Temperature (Cel)=260°C, Rep Pk Reverse Voltage-Max=100V, Time @ Peak Reflow Temperature-Max (s)=10s, AECQ=Yes, Diode Element Material=SILICON, Diode Type=RECTIFIER, JEDEC-95 Code=DO-214AC, JESD-30 Code=R-PDSO-C2, JESD-609 Code=e3, Moisture Sensitivity Level=1, Number of Elements=1, Pins=2, Reach SVHC Compliant=No, Reference Standard=AEC-Q101, RoHS Compliant=Yes, Surface Mount=Yes, Technology=SCHOTTKY, Terminal Finish=Tin
FL1: library part CMP-004-00034-1, "EMI Filter with Integrated ESD Protection 12pF 40dB 5V Flat Style SMD 16-Pin SLP4016P16 T/R", Max Breakdown Voltage=10V, Max Operating Temperature=125°C, Min Breakdown Voltage=6V, Min Operating Temperature=-40°C, Reverse Standoff Voltage=5V, China RoHS=Compliant, ESD Protection=Yes, Height=660.4µm, Length=3.9878mm, Lifecycle Status=Production, Packaging="Tape & Reel (TR)", Polarity=Bidirectional, REACH SVHC=Yes, RoHS=Compliant, Schedule B=8542390000, Width=1.6002mm
J1_ENET J_STP1 J_STP2 J_STP3 J_STP4 J_STP5 J_STP6 J_STP7 J_STP8: library part CMP-002-00133-1, "Header, Xh, Top, 4Way, 2.5Mm, Boss;", Case/Package=THT, Manufacturer=JST, Manufacturer Series=XH, Max Current Rating=3A, Max Operating Temperature=85°C, Min Operating Temperature=-25°C, Voltage Rating=250V, Connector Type=Header, Gender=Male, Height=7mm, Length=12.4mm, Pins=4, Pitch=2.4892mm
J1_I2C J2_I2C J_CAN0 J_CAN1: "CONN HEADER SMD 4POS 1MM", Current Rating (Amps)=0.7A, Insulation Color=Natural, Manufacturer="JST Sales America Inc.", Material Flammability Rating="UL94 V-0", Operating Temperature="-25°C ~ 85°C", Supplier Part Number 1=455-1790-1-ND, Voltage Rating=50V, ComponentLink1Description=Datasheet, ComponentLink1URL=http://www.jst-mfg.com/product/pdf/eng/eSH.pdf, ComponentLink2Description="DigiKey Link", ComponentLink2URL=http://digikey.com/product-detail/en/jst-sales-america-inc/BM04B-SRSS-TB-LF-SN/455-1790-1-ND/926861, Connector Type=Header, Contact Finish - Mating=Tin, Contact Finish - Post=Tin, Contact Material="Copper Alloy", Contact Shape=Square, Contact Type="Male Pin", Fastening Type=Push-Pull, Features="Solder Retention", Insulation Height="0.167\" (4.25mm)", Insulation Material="Polyamide (PA), Nylon", LastUpdated="8/24/2020 1:45:53 PM", Lifecycle Status=Active, Minimum Order=1, Mounting Type="Surface Mount", Number of Positions=4, Number of Positions Loaded=All, Number of Rows=1, Packaging=TapeAndReel, Part Number=BM04B-SRSS-TB(LF)(SN), Part Status=Active, PartId=16, Pitch - Mating="0.039\" (1.00mm)", Price=0.29, Row Spacing - Mating="-25°C ~ 85°C", Series=SR, Shrouding="Shrouded - 4 Wall", Style="Board to Cable/Wire", Supplier 1=DigiKey, Termination=Solder
J1_MCU: library part CMP-002-00103-1, "Board Connector, 14 Contact(s), 2 Row(s), Male, Straight, 0.05 inch Pitch, Surface Mount Terminal, Locking, Receptacle", Flammability Rating="UL94 V-0", Manufacturer=Samtec, Manufacturer Series=FTSH, Max Current Rating=3.4A, Body Breadth=0.135inch, Body Length=0.35inch, Body/Shell Style=RECEPTACLE, Connector Type="BOARD CONNECTOR", Contact Finish - Mating="GOLD (10) OVER NICKEL (50)", Contact Finish - Termination="Tin (Sn) - with Nickel (Ni) barrier", Contact Gender=Male, Contact Material=Bronze, Contact Pattern=RECTANGULAR, Contact Style="SQ PIN-SKT", DIN Conformance=No, Filter Feature=No, Gender=Male, IEC Conformance=No, Insulation Material=Polymer, JESD-609 Code=e3, Mating Contact Pitch=0.05inch, Mating Contact Row Spacing=0.05inch, Mating Information="MULTIPLE MATING PARTS AVAILABLE", MIL Conformance=No, Mixed Contacts=No, Mounting Option 1=LOCKING, Mounting Style=STRAIGHT, Mounting Technology=Board, Number Of Connectors=1, Number of Contacts=14, Number Of PCB Rows=2, Number of Rows Loaded=2, Option="General Purpose", PCB Contact Pattern=RECTANGULAR, PCB Contact Row Spacing=4.064mm, Pins=14, Plating Thickness=10uin, Reach SVHC Compliant=Yes, Reference Standard=UL, Reliability=COMMERCIAL, RoHS Compliant=Yes, Terminal Pitch=1.27mm, Termination=SMD/SMT
J1_PWR: "CONN PWR JACK 2X5.5MM SOLDER", Current Rating (Amps)=5A, Manufacturer="CUI Devices", Material Flammability Rating="UL94 V-0", Supplier Part Number 1=CP-002AHPJCT-ND, Voltage - Rated=24VDC, Actual Diameter="0.079\" (2.00mm ID), 0.256\" (6.50mm OD)", ComponentLink1Description=Datasheet, ComponentLink1URL=https://www.cuidevices.com/product/resource/digikeypdf/pj-002ah-smt-tr.pdf, ComponentLink2Description="DigiKey Link", ComponentLink2URL=http://digikey.com/product-detail/en/cui-devices/PJ-002AH-SMT-TR/CP-002AHPJCT-ND/669692, Connector Type=Jack, Features="Board Guide", Gender=Male, Industry Recognized Mating Diameter="2.00mm ID (0.079\"), 5.50mm OD (0.217\")", Internal Switch(s)="Single Switch, Normally Closed", LastUpdated="5/26/2020 1:33:39 PM", Lifecycle Status=Active, Mating Length/Depth="0.350\" (8.90mm)", Minimum Order=1, Mounting Type="Surface Mount", Number of Positions/Contacts="2 Conductors, 3 Contacts", Packaging=TapeAndReel, Part Number=PJ-002AH-SMT-TR, Part Status=Active, Price=0.90, Series=-, Shielding=Unshielded, Supplier 1=DigiKey, Termination=Solder
J_BTN1 J_BTN2 J_BTN3 J_BTN4 J_BTN5 J_BTN6 J_BTN7 J_BTN8 J_COIL1 J_COIL2 J_COIL3 J_COIL4 J_COIL5 J_COIL6 J_COIL7 J_COIL8: "CONN HEADER SMD 2POS 1MM", Current Rating (Amps)=0.7A, Insulation Color=Natural, Manufacturer="JST Sales America Inc.", Material Flammability Rating="UL94 V-0", Operating Temperature="-25°C ~ 85°C", Supplier Part Number 1=455-1788-1-ND, Voltage Rating=50V, ComponentLink1Description=Datasheet, ComponentLink1URL=http://www.jst-mfg.com/product/pdf/eng/eSR.pdf, ComponentLink2Description="DigiKey Link", ComponentLink2URL=http://digikey.com/product-detail/en/jst-sales-america-inc/BM02B-SRSS-TB-LF-SN/455-1788-1-ND/926859, Connector Type=Header, Contact Finish - Mating=Tin, Contact Finish - Post=Tin, Contact Material="Copper Alloy", Contact Shape=Square, Contact Type="Male Pin", Fastening Type=Push-Pull, Features="Solder Retention", Insulation Height="0.167\" (4.25mm)", Insulation Material="Polyamide (PA), Nylon", LastUpdated="1/12/2020 10:11:04 PM", Lifecycle Status=Active, Minimum Order=1, Mounting Type="Surface Mount", Number of Positions=2, Number of Positions Loaded=All, Number of Rows=1, Packaging=TapeAndReel, Part Number=BM02B-SRSS-TB(LF)(SN), Part Status=Active, PartId=12, Pitch - Mating="0.039\" (1.00mm)", Price=0.22, Series=SR, Shrouding="Shrouded - 4 Wall", Style="Board to Cable/Wire", Supplier 1=DigiKey, Termination=Solder
J_SD1: library part CMP-002-00094-1, "Micro SD Card Connector, 9 Positions, Connector and Ejector, Push In, Auto Eject Out, Surface Mount, 1.8 mm Height...", Case/Package="SD (Micro)", Manufacturer="Same Sky", Manufacturer Series=SD, Max Current Rating=500mA, Connector Type="SD Card", Gender=Female, Pins=9
L1_PWR: library part CMP-006-00022-5, "General Purpose Inductor, 4.7uH, 20%, 1 Element, Metal Alloy-Core, SMD, 1210", Case/Package=1210, Current Rating=2A, Max Operating Temperature=125°C, Min Operating Temperature=-40°C, Tolerance=20%, AECQ=Yes, ComponentLink2Description=https://www.bourns.com/docs/Product-Datasheets/SRP4021HMCT.pdf, DCR=98m, Pins=2
Q1_IP Q2_IP: library part CMP-013-00035-1, "Power Field-Effect Transistor, 120A I(D), 60V, 0.0014ohm, 1-Element, N-Channel, Silicon, Metal-oxide Semiconductor FET", Case/Package=8-PowerVDFN, Max Operating Temperature=175°C, Min Operating Temperature=-55°C, Power=4.8W, Pins=8, RoHS Compliant=Yes, Transistor Type=n-FET
Q_COIL1 Q_COIL2 Q_COIL3 Q_COIL4 Q_COIL5 Q_COIL6 Q_COIL7 Q_COIL8: library part CMP-013-00038-2, "Transistor MOSFET N-CH 30V 4A 3-Pin SOT-23F Emboss T/R", Case/Package=SOT-23F, Max Operating Temperature=150°C, Mounting Technology=SMD, Pins=3, RoHS Compliant=Yes, Transistor Type=n-FET, Vgs (Max)=12V, Vgs(th) (Max) @ Id=1V
R1 R1_BTN1 R1_BTN2 R1_BTN3 R1_BTN4 R1_BTN5 R1_BTN6 R1_BTN7 R1_BTN8 R1_PRES R2_PRES R51: library part CMP-009-00185-9, "Res Thick Film 0402 10K Ohm 5% 1/10W ±200ppm/°C Molded SMD Punched Carrier T/R", Case/Package=0402, Max Operating Temperature=155°C, Min Operating Temperature=-55°C, Power=100mW, Tolerance=5%, AECQ=No, Mounting Technology="Surface Mount", Pins=2, RoHS Compliant=Yes
R1_CAN0 R1_CAN1 R2_CAN0 R2_CAN1: library part CMP-009-00189-2, "Res 60.4 Ohm 1% 1/8W 0805", Case/Package=0805, Power=125mW, Tolerance=1%, AECQ=Yes, Manufacturer Part Number=TFA0805R60R4F-T5, Mounting Technology=SMD, Pins=2
R1_ENET R2_BTN1 R2_BTN2 R2_BTN3 R2_BTN4 R2_BTN5 R2_BTN6 R2_BTN7 R2_BTN8 R8_ENET R11_ENET R13_MCU: library part CMP-009-00182-8, "Fixed Resistor, Metal Glaze/thick Film, 0.0625W, 1000ohm, 50V, 1% +/-Tol, 100ppm/Cel, Surface Mount, 0402", Case/Package=0402, Manufacturer Part Number=Blank, Max Operating Temperature=155°C, Min Operating Temperature=-55°C, Package Height=0.35mm, Package Length=1mm, Package Shape=Rectangular, Package Width=0.5mm, Power=62.5mW, Rated Temperature=70°C, Resistor Type="FIXED RESISTOR", Temperature Coefficient (ppm/Cel)=100, Tolerance=1%, Working Voltage=50V, Additional Feature="LASER TRIMMABLE", AECQ=No, Construction=Chip, JESD-609 Code=e3, Mounting Technology="Surface Mount", Packaging="Tape and Reel", Pins=2, Reach SVHC Compliant=Yes, RoHS Compliant=Yes, Technology="METAL GLAZE/THICK FILM", Terminal Finish=Nickel, Termination=Wraparound
R1_IP: library part CMP-009-00192-1, "Fixed Resistor, Metal Strip, 1W, 0.002ohm, 0.045V, 1% +/-Tol, 150ppm/Cel, Surface Mount, 0612", Case/Package=0612, Manufacturer Part Number=TFA0805R60R4F-T5, Max Operating Temperature=170°C, Min Operating Temperature=-65°C, Power=1W, Tolerance=1%, AECQ=Yes, Mounting Technology="Surface Mount", Pins=4, RoHS Compliant=Yes
R1_MCU: library part CMP-009-00209-4, "Fixed Resistor, Metal Glaze/thick Film, 0.0625W, 620ohm, 50V, 5% +/-Tol, 100ppm/Cel, Surface Mount, 0402", Case/Package=0402, Max Operating Temperature=155°C, Min Operating Temperature=-55°C, Power=62.5mW, Tolerance=5%, AECQ=No, Mounting Technology="Surface Mount", Pins=2, RoHS Compliant=Yes
R1_PWR R2_PWR: library part CMP-009-00198-3, "Fixed Resistor, Metal Glaze/thick Film, 0.0625W, 36000ohm, 50V, 1% +/-Tol, 100ppm/Cel, Surface Mount, 0402", Case/Package=0402, Max Operating Temperature=155°C, Min Operating Temperature=-55°C, Power=62.5mW, Tolerance=1%, AECQ=Yes, Mounting Technology=SMD, Pins=2
R1_STP1 R1_STP2 R1_STP3 R1_STP4 R1_STP5 R1_STP6 R1_STP7 R1_STP8 R2_STP1 R2_STP2 R2_STP3 R2_STP4 R2_STP5 R2_STP6 R2_STP7 R2_STP8: library part CMP-009-00231-1, "Res 0.002 Ohm 1% 1.5W 1206", Case/Package=1206, Manufacturer Part Number=Blank, Max Operating Temperature=170°C, Min Operating Temperature=-55°C, Power=1.5W, Tolerance=1%, AECQ=Yes, Mounting Technology=SMD, Pins=2
R2_ENET R3_ENET R4_ENET R6_ENET R7_ENET R9_ENET R10_ENET: library part CMP-009-00205-4, "Fixed Resistor, Metal Glaze/thick Film, 0.1W, 33ohm, 50V, 1% +/-Tol, 100ppm/Cel, Surface Mount, 0402", Case/Package=0402, Max Operating Temperature=155°C, Min Operating Temperature=-55°C, Power=625mW, Tolerance=1%, Voltage Rating=50V, AECQ=Yes, Mounting Technology=SMD, Pins=2
R2_IP R3_IP: library part CMP-009-00199-3, "Fixed Resistor, Metal Glaze/thick Film, 0.0625W, 680000ohm, 50V, 5% +/-Tol, 100ppm/Cel, Surface Mount, 0402", Case/Package=0402, Max Operating Temperature=155°C, Min Operating Temperature=-55°C, Power=62.5mW, Tolerance=5%, AECQ=Yes, Mounting Technology=SMD, Pins=2
R2_MCU R3_MCU R3_PWR R4_MCU R4_PWR R5_MCU R5_PWR R6_MCU R6_PWR R7_MCU R7_PWR R8_MCU R8_PWR R9_PWR R10_PWR R14_ENET R16_ENET: library part CMP-009-00184-8, "Fixed Resistor, Metal Glaze/thick Film, 0.0625W, 4700ohm, 50V, 5% +/-Tol, 100ppm/Cel, Surface Mount, 0402", Case/Package=0402, Manufacturer Part Number=Blank, Max Operating Temperature=155°C, Min Operating Temperature=-55°C, Package Height=0.35mm, Package Length=1mm, Package Shape=Rectangular, Package Width=0.5mm, Power=62.5mW, Rated Temperature=70°C, Resistor Type="FIXED RESISTOR", Temperature Coefficient (ppm/Cel)=200, Tolerance=5%, Working Voltage=50V, Additional Feature="LASER TRIMMABLE", AECQ=No, Construction=Chip, JESD-609 Code=e3, Mounting Technology="Surface Mount", Packaging="Tape and Reel", Pins=2, Reach SVHC Compliant=Yes, RoHS Compliant=Yes, Technology="METAL GLAZE/THICK FILM", Terminal Finish=Nickel, Termination=Wraparound
R4_IP R6_IP: library part CMP-009-00221-1, "Res Thick Film 0402 11K Ohm 1% 0.063W(1/16W) ±100ppm/C Pad SMD Automotive T/R", Case/Package=0402, Max Operating Temperature=155°C, Min Operating Temperature=-55°C, Power=62.5mW, Tolerance=1%, AECQ=Yes, Mounting Technology="Surface Mount", Pins=2, RoHS Compliant=Yes
R5_IP: library part CMP-009-00193-3, "Fixed Resistor, Metal Glaze/thick Film, 0.125W, 22000ohm, 75V, 1% +/-Tol, 100ppm/Cel, Surface Mount, 0402", Case/Package=0402, Max Operating Temperature=155°C, Min Operating Temperature=-55°C, Power=125mW, Tolerance=1%, AECQ=Yes, Manufacturer Part Number=AC0402FR-7W22KL, Mounting Technology=SMD, Pins=2
R10_MCU R11_MCU R12_MCU: library part CMP-009-00225-1, "Res Thick Film 0402 330 Ohm 1% 0.063W ±100ppm/°C Molded SMD Paper T/R", Case/Package=0402, Max Operating Temperature=155°C, Min Operating Temperature=-55°C, Power=62.5mW, Tolerance=1%, AECQ=Yes, Mounting Technology="Surface Mount", Pins=2, RoHS Compliant=Yes
R12_ENET: library part CMP-009-00204-3, "Fixed Resistor, Metal Glaze/thick Film, 0.0625W, 6490ohm, 50V, 1% +/-Tol, 100ppm/Cel, Surface Mount, 0402", Case/Package=0402, Max Operating Temperature=155°C, Min Operating Temperature=-55°C, Power=625mW, Tolerance=1%, AECQ=Yes, Mounting Technology=SMD, Pins=2
R17_ENET R18_ENET R19_ENET R20_ENET R21_ENET R22_ENET R23_ENET R24_ENET R25_ENET R26_ENET R27_ENET R28_ENET R29_ENET R30_ENET R31_ENET R32_ENET R33_ENET R34_ENET R35_ENET R36_ENET: library part CMP-009-00183-8, "Fixed Resistor, Metal Glaze/thick Film, 0.0625W, 2200ohm, 50V, 5% +/-Tol, 200ppm/Cel, Surface Mount, 0402", Case/Package=0402, Manufacturer Part Number=Blank, Max Operating Temperature=125°C, Min Operating Temperature=-55°C, Package Height=0.35mm, Package Length=1mm, Package Shape=Rectangular, Package Width=0.5mm, Power=62.5mW, Rated Temperature=70°C, Resistor Type="FIXED RESISTOR", Temperature Coefficient (ppm/Cel)=200, Tolerance=5%, Working Voltage=50V, AECQ=No, Construction=Chip, JESD-609 Code=e3, Mounting Technology="Surface Mount", Packaging="Tape and Reel", Pins=2, Reach SVHC Compliant=No, RoHS Compliant=Yes, Technology="RUTHENIUM OXIDE", Terminal Finish=Nickel, Termination=Wraparound
TVS1_CAN0 TVS1_CAN1: library part CMP-004-00032-1, "ESD protection for in-vehicle networks", Case/Package=TO-236AB, AECQ=Yes, Pins=3
U1: library part CMP-031-00013-2, "16-bit I2C General Purpose IO Expander with Interrupt, Reset, -40 to 85 °C, RoHS", Case/Package=14-TSSOP, Max Operating Temperature=85°C, Max Supply Voltage=5.5V, Min Operating Temperature=-40°C, Min Supply Voltage=1.65V, AECQ=No, Height - Seated (Max)=900µm, Length=4mm, Lifecycle Status=Production, MPN=PI4IOE5V6416ZDEX, Number of Circuits=1, Number of Terminals=24, Pins=14, REACH SVHC=Yes, RoHS=Compliant, Schedule B="8542390000, 8542390000", Terminal Pitch=500µm, Width=4mm
U1_CAN0 U1_CAN1: library part CMP-031-00007-4, "Interface Circuit, PDSO8", Case/Package="8-HVSON (3x3)", Max Operating Temperature=150°C, Min Operating Temperature=-40°C, AECQ=Yes, MPN=TJA1051TK/3/1J, Pins=8
U1_ENET: library part CMP-031-00009-2, "Ethernet Transceiver, 1-Trnsvr, PQCC32", Case/Package="32-VQFN (5x5)", Max Operating Temperature=105°C, Min Operating Temperature=-40°C, AECQ=No, MPN=DP83826ERHBR, Pins=32
U1_IP: library part CMP-031-00016-1, "100V UV/OV and Reverse Protection Controller with Bidirectional Circuit Breaker", Case/Package="10-DFN (3x3)", Max Operating Temperature=70°C, Min Operating Temperature=0°C, MPN=LTC4368CMS-1#PBF, AECQ=Yes, Mounting Technology=SMD, Pins=10, RoHS Compliant=Yes
U1_MCU: library part CMP-020-00028-1, "MCU 32-bit ARM Cortex M7 RISC 512KB Flash 1.8V/2.5V/3.3V 100-Pin LQFP Tray", Case/Package="100-LQFP (14x14)", Frequency=550MHz, Max Operating Temperature=85°C, Min Operating Temperature=-40°C, PartId=1, RoHS Compliant=Yes
U1_PRES U2_PRES: library part CMP-010-00049-1, "Pressure Sensor 14.5PSI(-100 - 100)kPa", Case/Package=6-DIP, Max Operating Temperature=100°C, Min Operating Temperature=-20°C, Nominal Supply Voltage=3.3V, Mounting Technology=SMD, Pins=6, Sensor Type="Barometric Pressure"
U1_PWR_LDO1 U1_PWR_LDO2: library part CMP-019-00061-1, "LDO Voltage Regulator, 1 Output, Fixed, 0-15V in, 3.3V Out, 1.2V Drop, 1A out, SOT-223-3", Case/Package=SOT-223-3, Dropout Voltage=1.2V, Max Operating Temperature=125°C, Max Supply Voltage=15V, Min Input Voltage=4.8V, Min Operating Temperature=-40°C, Output Current=1A, Output Voltage=3.3V, AECQ=Yes, Mounting Technology=SMT, Pins=3
U2_PWR: "5V fixed step down Buck"
U2_STP1 U2_STP2 U2_STP3 U2_STP4 U2_STP5 U2_STP6 U2_STP7 U2_STP8: library part CMP-031-00019-2, "Step/Direction StealthChop Stepper Motor Driver Two-Phase 4.75V to 29V 28-Pin QFN Tray", Case/Package="32-TQFN (5x5)", Max Operating Temperature=125°C, Max Supply Voltage=29V, Min Operating Temperature=-40°C, Min Supply Voltage=1.5V, MPN=TMC5240ATJ+T, AECQ=No, Mounting Technology=SMD, Pins=32
Y1_ENET Y2_MCU: library part CMP-003-00030-1, "Crystal 25.000 Mhz 12PF SMD", Case/Package=3.2x2.5, Frequency=25MHz, Load Capacitance=12pF, Max Operating Temperature=125°C, Min Operating Temperature=-40°C, AECQ=Yes, ESR=50, Mounting Technology=SMD, Pins=4
Y1_MCU: library part CMP-003-00031-2, "Parallel - Fundamental Quartz Crystal, 0.032768MHz Nom", Case/Package=3.2.x1.5, Frequency=32.769kHz, Load Capacitance=7pF, Max Operating Temperature=125°C, Min Operating Temperature=-40°C, ESR=80k, Pins=2, RoHS Compliant=Yes

## Free pads (board coordinates)
  round 6 / inner round 0 / far side round 6 hole 3.2: MH1(5,5) MH2(5,60) MH3(90,60) MH4(90,5)

## Via types
v1: diameter 0.45, hole 0.3, Top Layer to Bottom Layer, tented both sides, 633 vias
v2: diameter 0.55, hole 0.4, Top Layer to Bottom Layer, tented both sides, 12 vias

## Nets (pads, with @x,y where several pads share a name; then routed paths per layer and width w, separated by ;. In a path a pad name is that pad's centre, name@x,y a point inside that pad or via, vN(x,y) a via of type N, cw(c..) or ccw(c..) an arc to the next point about the centre after c; other vN are vias at no path point)
3V3_LOGIC: C1.2 C1_CAN0.1 C1_CAN1.1 C1_PRES.2 C3_ENET.2 C3_PRES.2 C3_PWR_LDO2.2 C4_ENET.2 C4_PWR_LDO2.2 C5_ENET.2 C5_STP1.2 C5_STP2.2 C5_STP3.2 C5_STP4.2 C5_STP5.2 C5_STP6.2 C5_STP7.2 C5_STP8.2 C6_ENET.2 C9_ENET.2 C10_ENET.2 C11_ENET.2 C12_ENET.2 C32.2 D1_ENET.2 D2_ENET.2 FL1.4 FL1.5 FL1.12 FL1.13 J_SD1.4 R1.2 R1_ENET.2 R7_PWR.2 R14_ENET.2 R16_ENET.2 R17_ENET.2 R18_ENET.2 R19_ENET.2 R20_ENET.2 R21_ENET.2 R22_ENET.2 R23_ENET.2 R24_ENET.2 R25_ENET.2 R26_ENET.2 R51.2 U1.21 U1.23 U1_CAN0.5 U1_CAN1.5 U1_ENET.3 U1_ENET.17 U1_PRES.2 U1_PWR_LDO2.2 U1_PWR_LDO2.4 U2_PRES.2 U2_STP1.15 U2_STP2.9 U2_STP2.15 U2_STP3.10 U2_STP3.15 U2_STP4.9 U2_STP4.10 U2_STP4.15 U2_STP5.15 U2_STP6.9 U2_STP6.15 U2_STP7.10 U2_STP7.15 U2_STP8.9 U2_STP8.10 U2_STP8.15 | length 89.1
  Top Layer w0.254: v1(68.8,35.5) 69.962,34.338 70.062,34.338 v1(70.1,34.3) 70.153,34.3 70.203,34.35 U1_ENET.3@71,34.35 ; U1_ENET.17@75.973,31.848 76.321,31.5 ; C11_ENET.2@76.2,29.5 76.321,29.621 76.321,31.5 ; v1(78,31.5) C9_ENET.2@77,31.5 76.321,31.5
  Top Layer w0.5: U1_PWR_LDO2.2@36,4.4 v1(38.1,4.4) v1(39.2,4.4) v1(40.3,4.4) U1_PWR_LDO2.4@42.4,4.4 ; C3_PWR_LDO2.2@42.9,1.9 C4_PWR_LDO2.2@42.9,7
  Bottom Layer w0.127: v1(28,35.6) U2_STP6.9@28,36.477 ; v1(28,50.3) U2_STP2.9@28,51.177 ; U2_STP7.10@40.4,36.477 40.4,35.636 40.6,35.436 v1(40.6,35.4) ; U2_STP3.10@40.4,51.177 40.4,50.336 40.6,50.136 v1(40.6,50.1) ; U2_STP8.10@53.3,36.477 53.3,35.636 53.5,35.436 v1(53.5,35.4) 53.8,35.7 U2_STP8.9@53.8,36.477 ; U2_STP4.10@53.3,51.177 53.3,50.336 53.5,50.136 v1(53.5,50.1) 53.8,50.4 U2_STP4.9@53.8,51.177 ; v1(69.4,20) 70.1,20.7 71.4,20.7 72.1,20 R51.2@72.2,20 ; R14_ENET.2@70.3,32 R16_ENET.2@70.3,33 70.3,33.1 70.1,33.3 v1(70.1,34.3) 71.8,34.3 ; R20_ENET.2@72.3,36 72.3,35.9 71.8,35.4 71.8,34.3 ; R22_ENET.2@75.1,36 75.1,36.1 75.4,36.4 75.4,37.4 75.9,37.9 R23_ENET.2@75.9,38 v1(76.5,38) ; R18_ENET.2@75.3,33.6 75.3,33.7 74.8,34.2 73.22,34.2 72.881,33.861 72.661,33.861 72.5,33.7 R17_ENET.2@72.5,33.6 71.8,34.3
  Bottom Layer w0.254: 11.3,50.322 11.3,51.974 11.426,52.1 U2_STP1.15@11.677,52.1 ; C5_STP5.2@11.5,35.3 v1(11.521,35.321) 11.479,35.321 11.327,35.473 11.327,35.595 11.3,35.622 11.3,37.275 11.426,37.4 U2_STP5.15@11.677,37.4 ; 24.2,50.322 24.2,51.975 24.326,52.1 U2_STP2.15@24.577,52.1 ; C5_STP6.2@24.4,35.3 v1(24.421,35.321) 24.379,35.321 24.227,35.473 24.227,35.595 24.2,35.622 24.2,37.275 24.326,37.4 U2_STP6.15@24.577,37.4 ; 37.1,50.322 37.1,51.975 37.226,52.1 U2_STP3.15@37.477,52.1 ; C5_STP7.2@37.3,35.3 v1(37.321,35.321) 37.279,35.321 37.127,35.473 37.127,35.595 37.1,35.622 37.1,37.275 37.226,37.4 U2_STP7.15@37.477,37.4 ; 50,50.322 50,51.975 50.126,52.1 U2_STP4.15@50.377,52.1 ; C5_STP8.2@50.2,35.3 v1(50.221,35.321) 50.179,35.321 50.027,35.473 50.027,35.595 50,35.622 50,37.275 50.126,37.4 U2_STP8.15@50.377,37.4 ; v1(68.35,14.103) J_SD1.4@68.35,15.25 68.54,15.44 68.54,16.24 69.15,16.85 ; v1(68.8,35.5) 69.102,35.802 69.302,35.802 69.4,35.9 R26_ENET.2@69.4,36 69.4,36.8 C5_ENET.2@69.2,37 69.761,37 69.961,37.2 70,37.2 70,37.678 69.973,37.705 69.973,37.827 C12_ENET.2@69.8,38 R24_ENET.2@70.7,38 ; FL1.5@69.15,17.54 69.15,16.85 ; FL1.12@69.15,19.06 69.15,19.75 v1(69.4,20) 69.65,19.75 FL1.13@69.65,19.06 ; FL1.4@69.65,17.54 69.647,17.537 69.647,17.047 69.45,16.85 69.15,16.85 ; R18_ENET.2@75.3,33.6 C3_ENET.2@76.2,33.6 C6_ENET.2@76.2,32.6 76.278,32.522 76.278,32.122 76.7,31.7 R21_ENET.2@76.7,31.6 76.7,31.598 76.798,31.5 v1(78,31.5) 78.6,30.9 78.6,30.2 78.1,29.7 R25_ENET.2@77.1,29.7 ; U1_CAN1.5@89.645,42.875 89.667,42.875 89.7,42.908 C1_CAN1.1@89.7,44.1 v1(89.7,44.8) ; U1_CAN0.5@89.645,50.075 89.667,50.075 89.7,50.108 C1_CAN0.1@89.7,51.3 v1(89.7,52) ; C3_PRES.2@90.7,25 91.498,25 91.998,24.5 U2_PRES.2@92.28,24.5 ; C1_PRES.2@90.7,33.8 91.498,33.8 91.998,33.3 U1_PRES.2@92.28,33.3
  other v1: 50.375,24.775 11.5,50 24.4,50 37.3,50 50.2,50
3V3_MCU: C3_PWR_LDO1.2 C4_PWR_LDO1.2 C9_MCU.2 C10_MCU.2 C11_MCU.2 C12_MCU.2 C13_MCU.2 C14_MCU.2 C15_MCU.2 C16_MCU.2 C17_MCU.2 C18_MCU.2 D1_MCU.2 J1_MCU.3 R1_BTN1.2 R1_BTN2.2 R1_BTN3.2 R1_BTN4.2 R1_BTN5.2 R1_BTN6.2 R1_BTN7.2 R1_BTN8.2 R2_MCU.2 R3_MCU.2 R4_MCU.2 R5_MCU.2 R6_PWR.2 R7_MCU.2 R13_MCU.2 U1_MCU.11 U1_MCU.21 U1_MCU.27 U1_MCU.50 U1_MCU.75 U1_MCU.100 U1_PWR_LDO1.2 U1_PWR_LDO1.4 | length 41.2
  Top Layer w0.127: R4_MCU.2@40.7,25.4 40.816,25.516 41.141,25.516 41.225,25.6 v1(41.8,25.6)
  Top Layer w0.254: v1(41.8,20.6) U1_MCU.21@42.962,20.6 ; v1(41.8,25.6) U1_MCU.11@42.962,25.6 ; U1_MCU.100@44.7,32.338 v1(44.7,33.5) ; v1(45.2,15.3) U1_MCU.27@45.2,16.862 ; U1_MCU.50@56.7,16.862 v1(57.228,16.862) ; U1_MCU.75@58.438,30.6 v1(58.438,31.128)
  Top Layer w0.5: C4_PWR_LDO1.2@35.3,9 C3_PWR_LDO1.2@35.3,14.1 ; U1_PWR_LDO1.4@35.8,11.6 v1(37.9,11.6) v1(39,11.6) v1(40.1,11.6) U1_PWR_LDO1.2@42.2,11.6
  Bottom Layer w0.127: C18_MCU.2@42.7,20.3 42.9,20.1 R7_MCU.2@43.7,20.1 ; C13_MCU.2@45.1,32.8 45.2,32.7 R5_MCU.2@46.2,32.7 ; R3_MCU.2@54.9,31.7 R2_MCU.2@55.9,31.7 57.866,31.7 v1(58.438,31.128)
  Bottom Layer w0.254: D1_MCU.2@37.4,29.7 37.4,29.8 37.573,29.973 37.673,29.973 v1(38,30.3) ; v1(41.8,20.6) 41.853,20.6 42.019,20.434 42.566,20.434 C18_MCU.2@42.7,20.3 ; v1(41.8,25.6) C14_MCU.2@42.5,25.6 ; C10_MCU.2@44.1,32.8 C13_MCU.2@45.1,32.8 44.927,32.973 44.927,33.253 44.7,33.48 v1(44.7,33.5) v1@44.725,33.475 ; C11_MCU.2@44.2,16.4 C15_MCU.2@45.2,16.4 v1(45.2,15.3) ; C12_MCU.2@55.4,16.4 C16_MCU.2@56.4,16.4 56.532,16.532 56.898,16.532 v1(57.228,16.862) ; C9_MCU.2@57.9,29.2 C17_MCU.2@57.9,30.2 58.02,30.32 58.02,30.71 v1(58.438,31.128) ; R1_BTN5.2@66.1,42.5 v1(66.8,42.5) ; R1_BTN1.2@66.1,48.1 v1(66.8,48.1) ; R1_BTN6.2@71.3,42.5 v1(72,42.5) ; R1_BTN2.2@71.3,48.1 v1(72,48.1) ; R1_BTN7.2@76.5,42.5 v1(77.2,42.5) ; R1_BTN3.2@76.5,48.1 v1(77.2,48.1) ; R1_BTN8.2@81.7,42.5 v1(82.4,42.5) ; R1_BTN4.2@81.7,48.1 v1(82.4,48.1)
  other v1: 52.375,24.775
5V0_LOGIC: C1_PWR_LDO1.2 C1_PWR_LDO2.2 C2_CAN0.1 C2_CAN1.1 C2_PWR_LDO1.2 C2_PWR_LDO2.2 C6_PWR.2 C7_PWR.2 C8_PWR.2 L1_PWR.2 R5_PWR.2 U1_CAN0.3 U1_CAN1.3 U1_PWR_LDO1.3 U1_PWR_LDO2.3 U2_PWR.1 | length 17.4
  Top Layer w0.5: U1_PWR_LDO2.3@36,2.1 35.7,2.4 v1(34.9,2.4) ; U1_PWR_LDO1.3@42.2,13.9 42.5,13.6 v1(43.3,13.6) ; v1(34.9,2.4) C2_PWR_LDO2.2@34.1,2.4 C1_PWR_LDO2.2@34.1,3.4 34.13,3.37 34.73,3.37 v1(34.9,3.2) v1(34.9,2.4) ; v1(43.3,13.6) v1(43.3,12.8) 43.47,12.63 44.07,12.63 C1_PWR_LDO1.2@44.1,12.6 C2_PWR_LDO1.2@44.1,13.6 v1(43.3,13.6)
  Bottom Layer w0.254: U1_CAN1.3@86.755,42.225 86.149,42.225 86,42.374 86,43.951 86.149,44.1 C2_CAN1.1@86.7,44.1 87,44.4 v1(87,44.8) ; U1_CAN0.3@86.755,49.425 86.149,49.425 86,49.574 86,51.151 86.149,51.3 C2_CAN0.1@86.7,51.3 87,51.6 87,52
  other v1: 24.7,17.2 24.7,17.9 24.7,18.6 24.7,19.3 24.7,20 52.375,27.575
5VOUT_STP1: C6_STP1.2 U2_STP1.8 | length 1.9
  Bottom Layer w0.254: U2_STP1.8@15.6,51.176 15.6,50.6 16.168,50.032 16.668,50.032 C6_STP1.2@16.7,50
5VOUT_STP2: C6_STP2.2 U2_STP2.8 | length 1.9
  Bottom Layer w0.254: U2_STP2.8@28.5,51.176 28.5,50.6 29.068,50.032 29.568,50.032 C6_STP2.2@29.6,50
5VOUT_STP3: C6_STP3.2 U2_STP3.8 | length 1.9
  Bottom Layer w0.254: U2_STP3.8@41.4,51.176 41.4,50.6 41.968,50.032 42.468,50.032 C6_STP3.2@42.5,50
5VOUT_STP4: C6_STP4.2 U2_STP4.8 | length 1.9
  Bottom Layer w0.254: U2_STP4.8@54.3,51.176 54.3,50.6 54.868,50.032 55.368,50.032 C6_STP4.2@55.4,50
5VOUT_STP5: C6_STP5.2 U2_STP5.8 | length 1.9
  Bottom Layer w0.254: U2_STP5.8@15.6,36.477 15.6,35.9 16.168,35.332 16.668,35.332 C6_STP5.2@16.7,35.3
5VOUT_STP6: C6_STP6.2 U2_STP6.8 | length 1.9
  Bottom Layer w0.254: U2_STP6.8@28.5,36.477 28.5,35.9 29.068,35.332 29.568,35.332 C6_STP6.2@29.6,35.3
5VOUT_STP7: C6_STP7.2 U2_STP7.8 | length 1.9
  Bottom Layer w0.254: U2_STP7.8@41.4,36.477 41.4,35.9 41.968,35.332 42.468,35.332 C6_STP7.2@42.5,35.3
5VOUT_STP8: C6_STP8.2 U2_STP8.8 | length 1.9
  Bottom Layer w0.254: U2_STP8.8@54.3,36.477 54.3,35.9 54.868,35.332 55.368,35.332 C6_STP8.2@55.4,35.3
24V_IN: J1_PWR.1 Q1_IP.5 R1_PWR.2 R2_IP.2 R3_IP.2 U1_IP.1 | length 14